# EAGLE board MSP-EXP430F6137Rx-HW-V2_rev-b (EAGLE 5.08), part 1 of 2
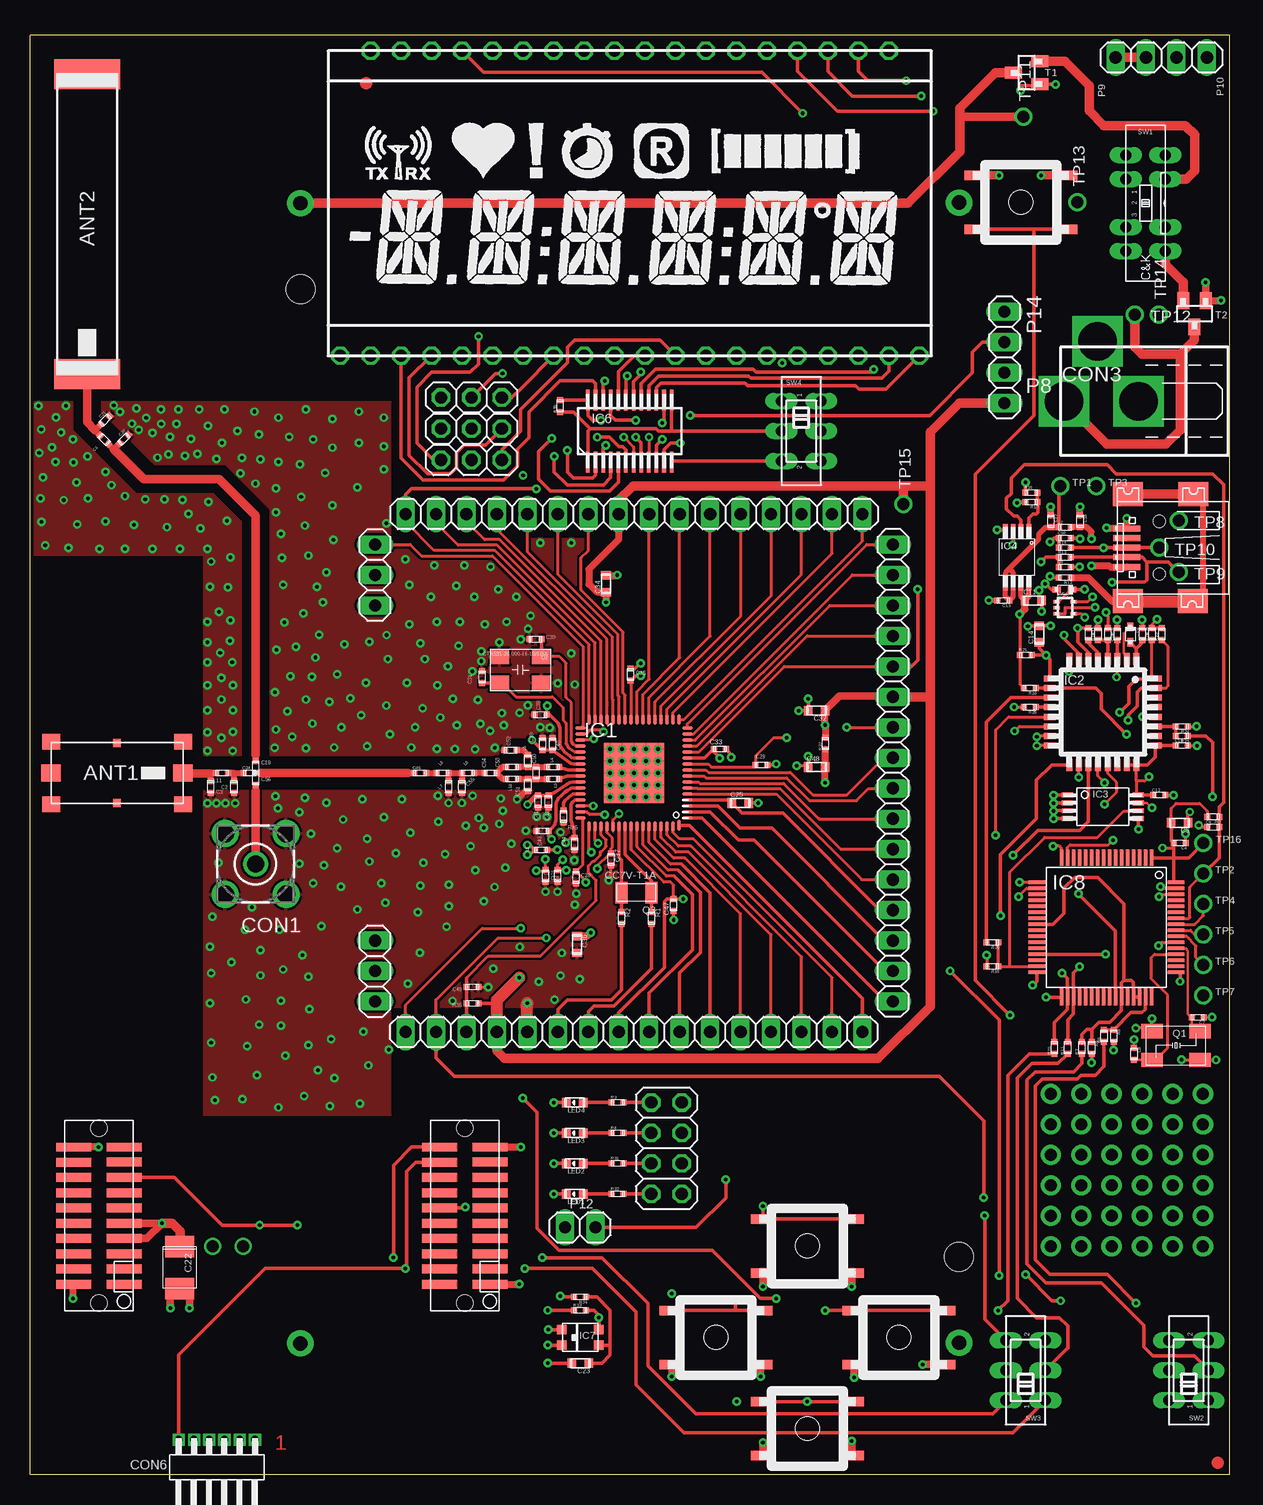
[diagram p0: board, top side]
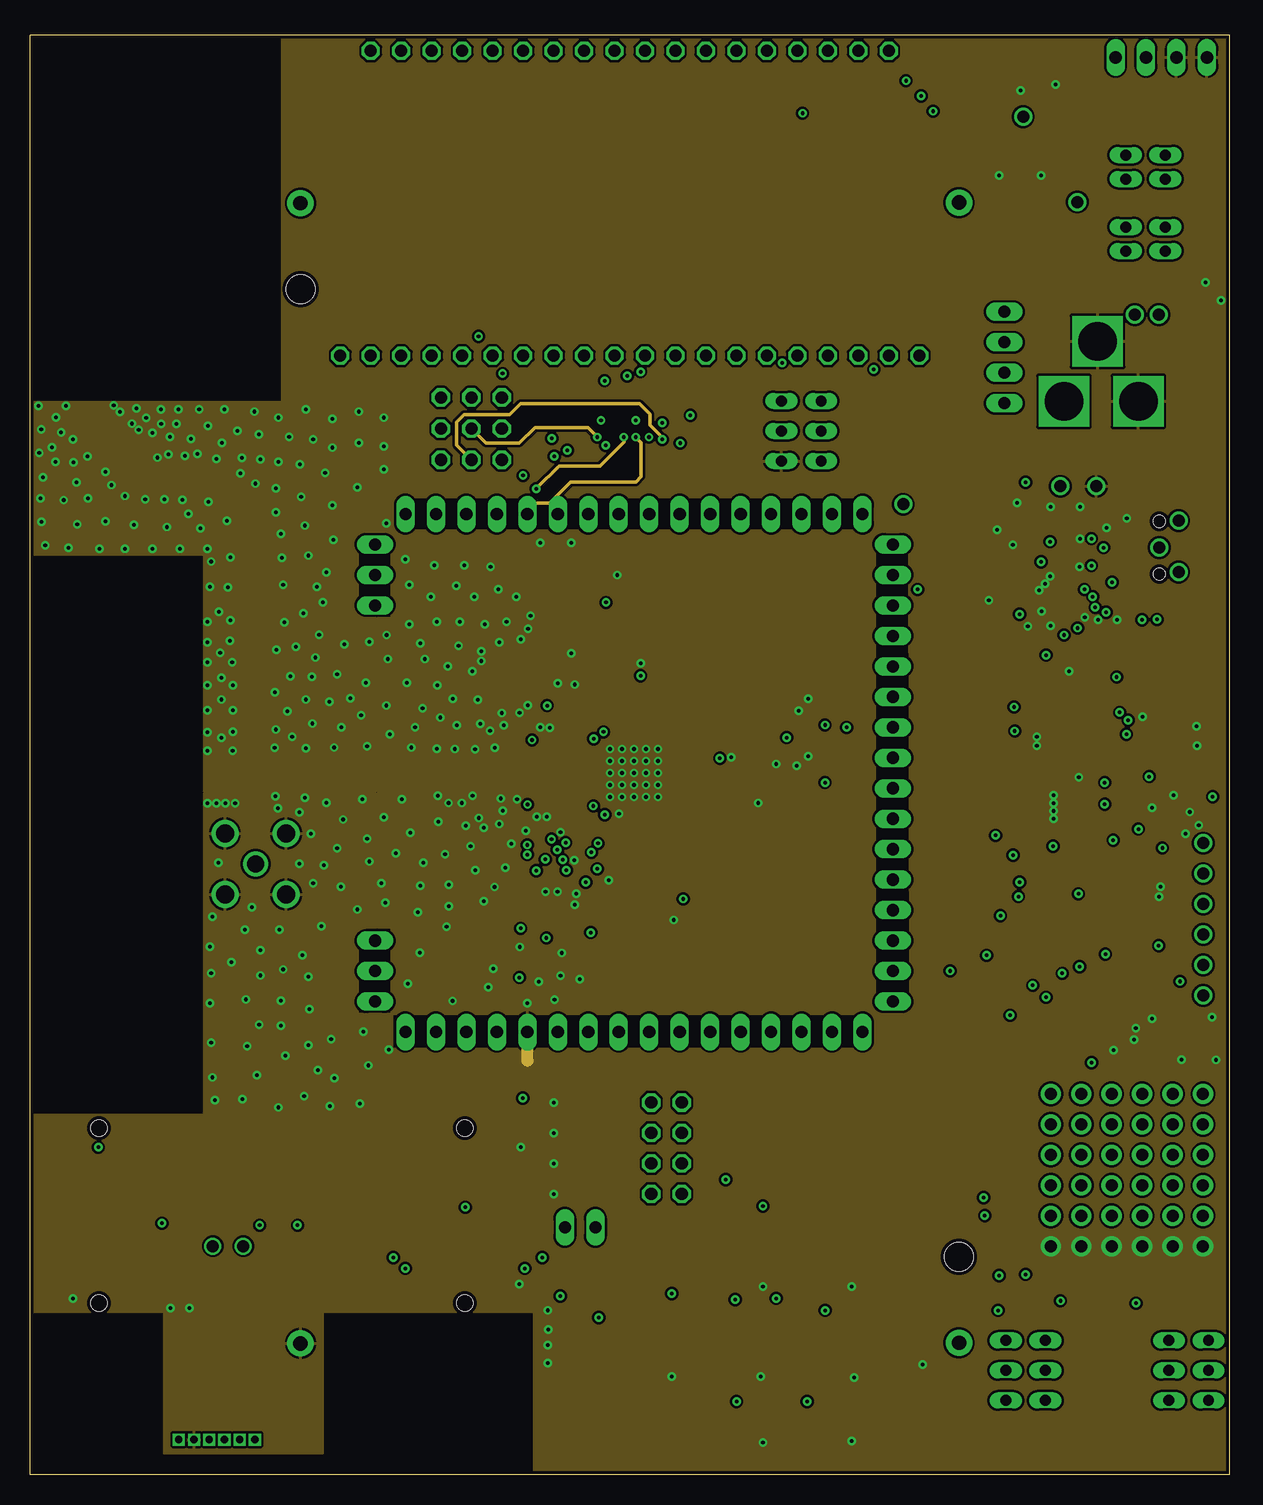
[diagram p1: board, inner layer Route2]
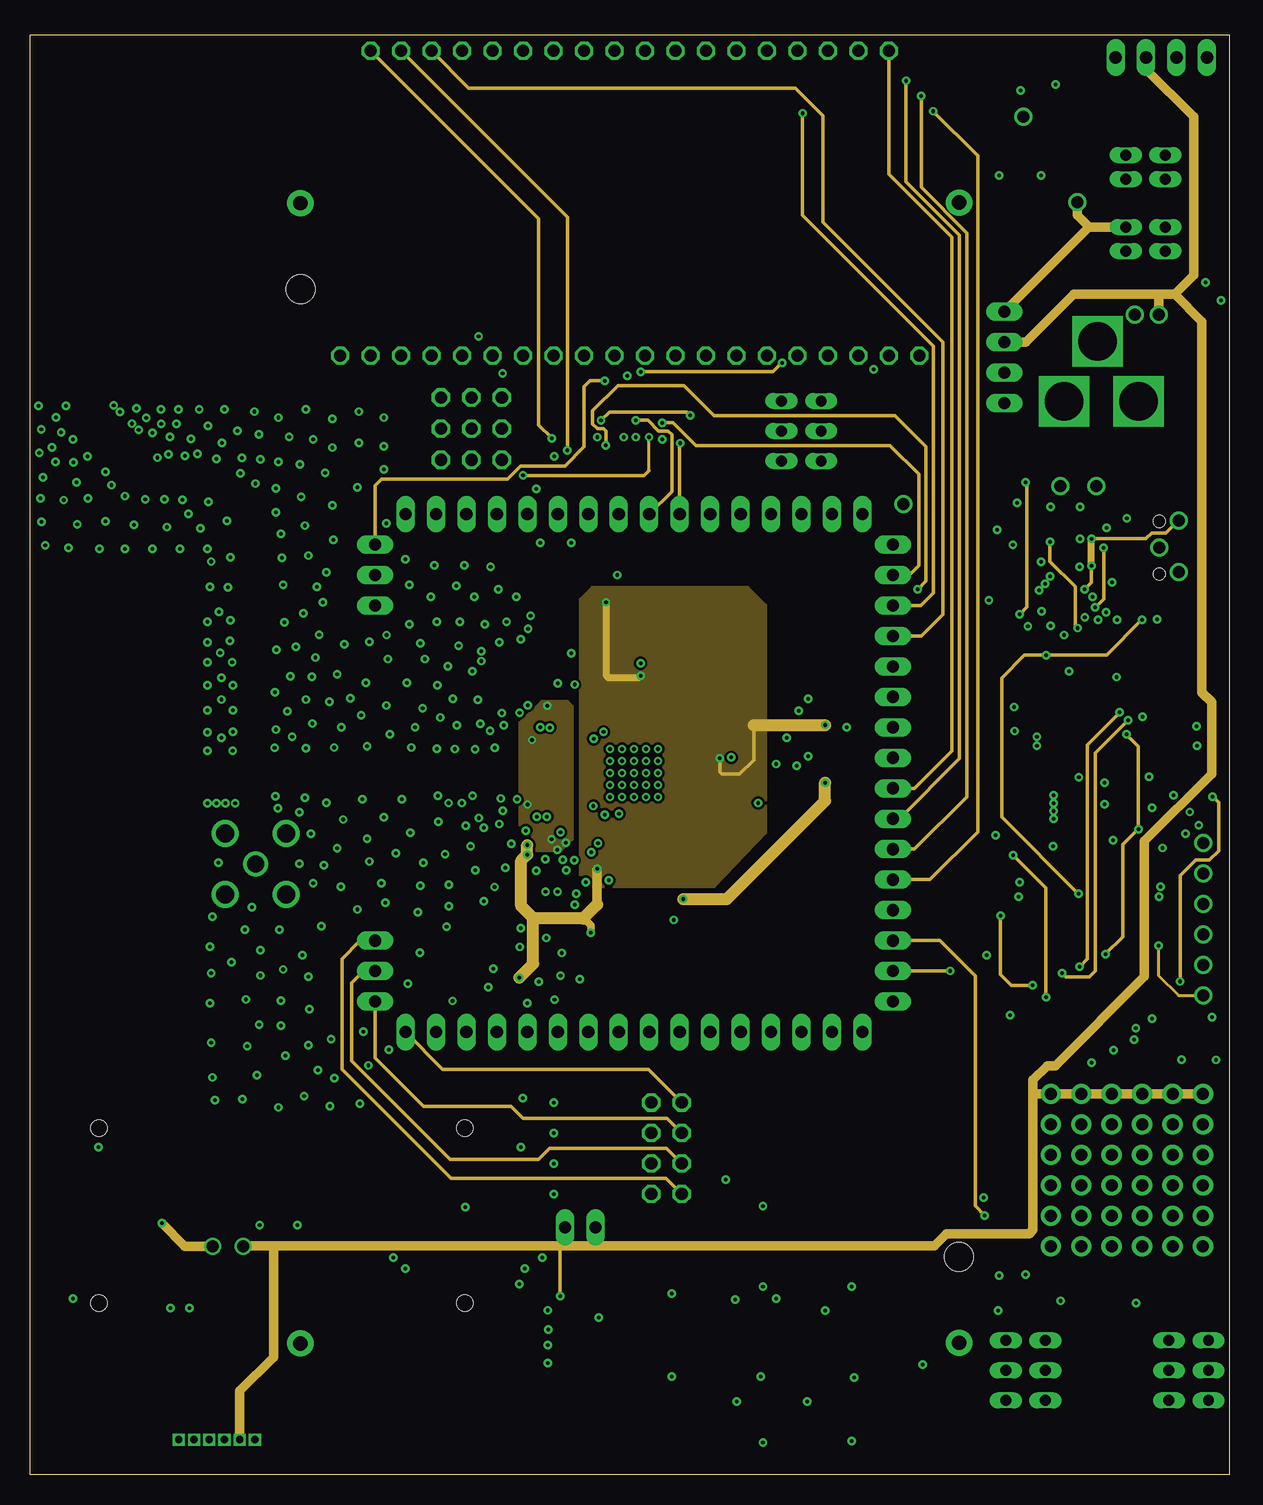
[diagram p2: board, inner layer Route3]
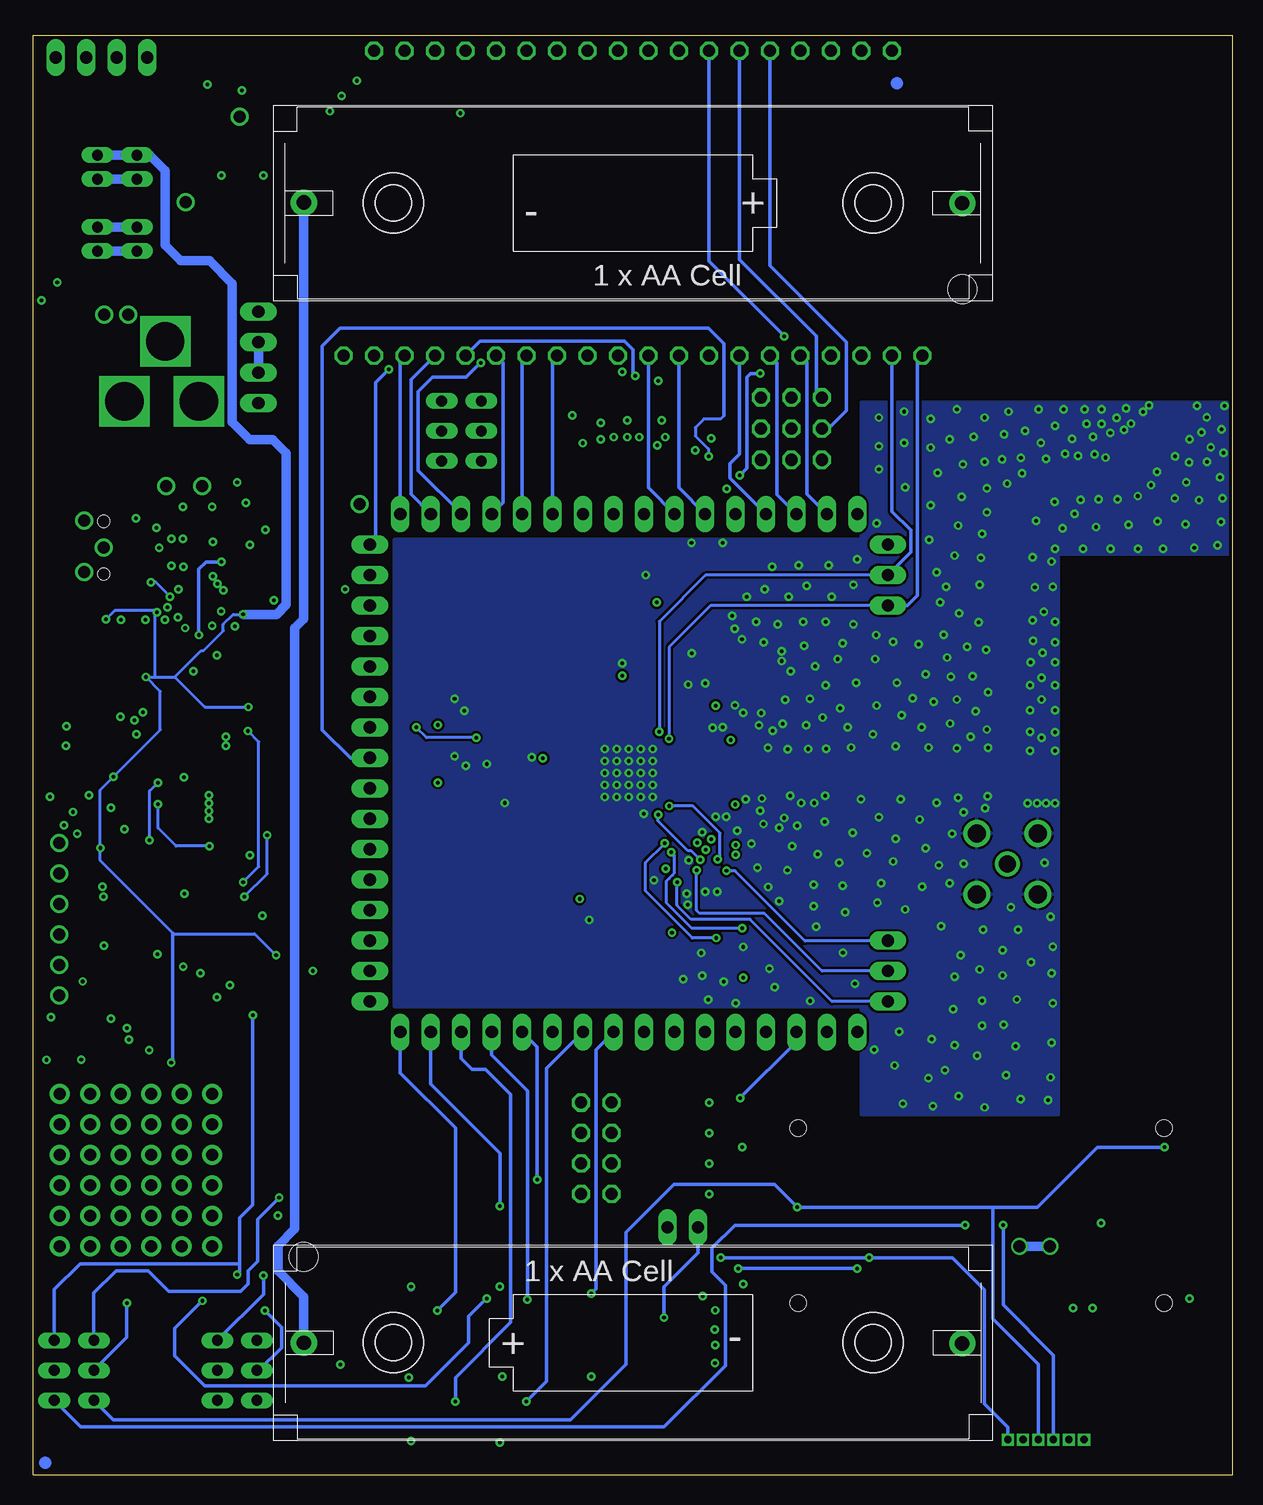
[diagram p3: board, bottom side, seen from below]

Size 100 x 120 mm. Coordinates in mm from the lower left corner, seen from the top.
Outline: 100,120 0,120 0,0 100,0 100,120
Copper layers (1*2+3*16): Top 0.035mm / dielectric 0.41mm / Route2 0.035mm / dielectric 0.3mm / Route3 0.035mm / dielectric 0.41mm / Bottom 0.035mm
Design rules "default *": minimum track width 0.1mm, minimum drill 0.2mm, track to track 0.2mm, track to pad 0.2mm, pad to pad 0.2mm, via to via 0.2mm, smd to smd 0.2mm, copper to edge 0.3mm, drill to drill 0.01mm, minimum pad ring 8mil, minimum via ring 0.2mm, stop-mask expansion 0.05mm, vias tented up to drill 0.4mm, thermal gap 0.2mm
Net classes: 1 ant: clearance 0.8 mm

## Footprints (pad centres in the part's own frame; a part is rotated, then mirrored left to right if it is on the bottom)
7488910092 = smd 1.5 x 1.3: 1 5.5,2.6; 3 5.5,-2.6; 6 -5.5,2.6; 8 -5.5,-2.6 | smd 1.6 x 1.4: 2 5.5,0; 7 -5.5,0 | smd 0.6 x 0.7: 4 0,2.5; 5 0,-2.5
0433AT62A0020 = smd 2.5 x 5.5: 1 -12.5,0; 2 12.5,0
1028-KEYSTONE = drill 1.2 pad 2.184 round: + -27.45,0; - 27.45,-0.05 | hole 2.4: -27.45,7.15
C0402 = smd 0.5 x 0.5: P$1 -0.5,0; P$2 0.5,0
C0603 = smd 0.7 x 0.8: 1 -0.7,0; 2 0.7,0
B/3528 = smd 1.8 x 2.4: 1 -1.75,0; 2 1.75,0
BU-SMA-V = drill 1.4 round: 1 0,0 | drill 1.5 round: 2 -2.55,2.55; 3 2.55,2.55; 4 2.55,-2.55; 5 -2.55,-2.55
USB-MINI-2486_01 = smd 0.5 x 2.25: 1 -1.6,2.7; 2 -0.8,2.7; 3 0,2.7; 4 0.8,2.7; 5 1.6,2.7 | smd 2 x 2.5: 6 4.45,2.6; 7 -4.45,2.6; 8 4.45,-2.85; 9 -4.45,-2.8 | hole 1: 2.2,0; -2.2,0
BUCHSE2,1MM = drill 3.2 square: + 0,6.2; - 0,0; S 5,3.4
SUSBFET_SL127L6_MPE = drill 0.6 pad 0.889 square: 1 -3.17,0.07; 2 -1.91,0.07; 3 -0.63,0.07; 4 0.63,0.07; 5 1.91,0.07; 6 3.18,0.07
SOD523 = smd 0.7 x 0.5: A 0.7,0; C -0.6,0
S-PQFP-N64 = smd 0.9 x 0.3: 1 -4.45,3.75; 2 -4.45,3.25; 3 -4.45,2.75; 4 -4.45,2.25; 5 -4.45,1.75; 6 -4.45,1.25; 7 -4.45,0.75; 8 -4.45,0.25; 9 -4.45,-0.25; 10 -4.45,-0.75; 11 -4.45,-1.25; 12 -4.45,-1.75; 13 -4.45,-2.25; 14 -4.45,-2.75; 15 -4.45,-3.25; 16 -4.45,-3.75; 33 4.45,-3.75; 34 4.45,-3.25; 35 4.45,-2.75; 36 4.45,-2.25; 37 4.45,-1.75; 38 4.45,-1.25; 39 4.45,-0.75; 40 4.45,-0.25; 41 4.45,0.25; 42 4.45,0.75; 43 4.45,1.25; 44 4.45,1.75; 45 4.45,2.25; 46 4.45,2.75; 47 4.45,3.25; 48 4.45,3.75 | smd 0.3 x 0.9: 17 -3.75,-4.45; 18 -3.25,-4.45; 19 -2.75,-4.45; 20 -2.25,-4.45; 21 -1.75,-4.45; 22 -1.25,-4.45; 23 -0.75,-4.45; 24 -0.25,-4.45; 25 0.25,-4.45; 26 0.75,-4.45; 27 1.25,-4.45; 28 1.75,-4.45; 29 2.25,-4.45; 30 2.75,-4.45; 31 3.25,-4.45; 32 3.75,-4.45; 49 3.75,4.45; 50 3.25,4.45; 51 2.75,4.45; 52 2.25,4.45; 53 1.75,4.45; 54 1.25,4.45; 55 0.75,4.45; 56 0.25,4.45; 57 -0.25,4.45; 58 -0.75,4.45; 59 -1.25,4.45; 60 -1.75,4.45; 61 -2.25,4.45; 62 -2.75,4.45; 63 -3.25,4.45; 64 -3.75,4.36 | smd 5 x 5: TP 0,0
VF32 = smd 1 x 0.5: 1 -4.4,2.8; 2 -4.4,2; 3 -4.4,1.2; 4 -4.4,0.4; 5 -4.4,-0.4; 6 -4.4,-1.2; 7 -4.4,-2; 8 -4.4,-2.8; 17 4.4,-2.8; 18 4.4,-2; 19 4.4,-1.2; 20 4.4,-0.4; 21 4.4,0.4; 22 4.4,1.2; 23 4.4,2; 24 4.4,2.8 | smd 0.5 x 1: 9 -2.8,-4.4; 10 -2,-4.4; 11 -1.2,-4.4; 12 -0.4,-4.4; 13 0.4,-4.4; 14 1.2,-4.4; 15 2,-4.4; 16 2.8,-4.4; 25 2.8,4.4; 26 2,4.4; 27 1.2,4.4; 28 0.4,4.4; 29 -0.4,4.4; 30 -1.2,4.4; 31 -2,4.4; 32 -2.8,4.4
TSSOP8 = smd 0.4 x 0.9: 1 -0.975,-2.95; 2 -0.325,-2.95; 3 0.325,-2.95; 4 0.975,-2.95; 5 0.975,2.95; 6 0.325,2.95; 7 -0.325,2.95; 8 -0.975,2.95
MSO8 = smd 0.4 x 1: 1 -0.975,-2.275; 2 -0.325,-2.275; 3 0.325,-2.275; 4 0.975,-2.275; 5 0.975,2.275; 6 0.325,2.275; 7 -0.325,2.275; 8 -0.975,2.275
SOT533-5 = smd 0.3 x 0.55: 1 -0.5,-0.7; 2 0,-0.7; 3 0.5,-0.7; 4 0.5,0.7; 5 -0.5,0.7
24-SSOP = smd 0.3 x 1.75: 1 -3.493,-2.6; 2 -2.857,-2.6; 3 -2.223,-2.6; 4 -1.587,-2.6; 5 -0.953,-2.6; 6 -0.318,-2.6; 7 0.318,-2.6; 8 0.953,-2.6; 9 1.587,-2.6; 10 2.223,-2.6; 11 2.857,-2.6; 12 3.493,-2.6; 13 3.493,2.6; 14 2.857,2.6; 15 2.223,2.6; 16 1.587,2.6; 17 0.953,2.6; 18 0.318,2.6; 19 -0.318,2.6; 20 -0.953,2.6; 21 -1.587,2.6; 22 -2.223,2.6; 23 -2.857,2.6; 24 -3.493,2.6
SFH5711 = smd 0.8 x 0.8: 1 -0.65,-1.55; 2 0.65,-1.55; 3 0.65,1.55; 4 -0.65,1.55
PM/PAG64 = smd 1.4 x 0.3: 1 -5.8,3.75; 2 -5.8,3.25; 3 -5.8,2.75; 4 -5.8,2.25; 5 -5.8,1.75; 6 -5.8,1.25; 7 -5.8,0.75; 8 -5.8,0.25; 9 -5.8,-0.25; 10 -5.8,-0.75; 11 -5.8,-1.25; 12 -5.8,-1.75; 13 -5.8,-2.25; 14 -5.8,-2.75; 15 -5.8,-3.25; 16 -5.8,-3.75; 33 5.8,-3.75; 34 5.8,-3.25; 35 5.8,-2.75; 36 5.8,-2.25; 37 5.8,-1.75; 38 5.8,-1.25; 39 5.8,-0.75; 40 5.8,-0.25; 41 5.8,0.25; 42 5.8,0.75; 43 5.8,1.25; 44 5.8,1.75; 45 5.8,2.25; 46 5.8,2.75; 47 5.8,3.25; 48 5.8,3.75 | smd 0.3 x 1.4: 17 -3.75,-5.8; 18 -3.25,-5.8; 19 -2.75,-5.8; 20 -2.25,-5.8; 21 -1.75,-5.8; 22 -1.25,-5.8; 23 -0.75,-5.8; 24 -0.25,-5.8; 25 0.25,-5.8; 26 0.75,-5.8; 27 1.25,-5.8; 28 1.75,-5.8; 29 2.25,-5.8; 30 2.75,-5.8; 31 3.25,-5.8; 32 3.75,-5.8; 49 3.75,5.8; 50 3.25,5.8; 51 2.75,5.8; 52 2.25,5.8; 53 1.75,5.8; 54 1.25,5.8; 55 0.75,5.8; 56 0.25,5.8; 57 -0.25,5.8; 58 -0.75,5.8; 59 -1.25,5.8; 60 -1.75,5.8; 61 -2.25,5.8; 62 -2.75,5.8; 63 -3.25,5.8; 64 -3.75,5.8
L0402 = smd 0.5 x 0.5: P$1 -0.5,0; P$2 0.5,0
CC-EXP430F6137RF9-LCD = drill 1 octagon: 1 -24.13,-12.7; 2 -21.59,-12.7; 3 -19.05,-12.7; 4 -16.51,-12.7; 5 -13.97,-12.7; 6 -11.43,-12.7; 7 -8.89,-12.7; 8 -6.35,-12.7; 9 -3.81,-12.7; 10 -1.27,-12.7; 11 1.27,-12.7; 12 3.81,-12.7; 13 6.35,-12.7; 14 8.89,-12.7; 15 11.43,-12.7; 16 13.97,-12.7; 17 16.51,-12.7; 18 19.05,-12.7; 19 21.59,-12.7; 20 24.13,-12.7; 21 21.59,12.7; 22 19.05,12.7; 23 16.51,12.7; 24 13.97,12.7; 25 11.43,12.7; 26 8.89,12.7; 27 6.35,12.7; 28 3.81,12.7; 29 1.27,12.7; 30 -1.27,12.7; 31 -3.81,12.7; 32 -6.35,12.7; 33 -8.89,12.7; 34 -11.43,12.7; 35 -13.97,12.7; 36 -16.51,12.7; 37 -19.05,12.7; 38 -21.59,12.7
0603 = smd 0.7 x 0.8: A -0.7,0; K 0.7,0
1X16 = drill 1.016 long: 1 -19.05,0; 2 -16.51,0; 3 -13.97,0; 4 -11.43,0; 5 -8.89,0; 6 -6.35,0; 7 -3.81,0; 8 -1.27,0; 9 1.27,0; 10 3.81,0; 11 6.35,0; 12 8.89,0; 13 11.43,0; 14 13.97,0; 15 16.51,0; 16 19.05,0
1X03 = drill 1.016 long: 1 -2.54,0; 2 0,0; 3 2.54,0
1X3_ROUND = drill 1.016 octagon: 1 -2.54,0; 2 0,0; 3 2.54,0
1X02 = drill 1.016 long: 1 -1.27,0; 2 1.27,0
2X04 = drill 1.016 octagon: 1 -3.81,-1.27; 2 -3.81,1.27; 3 -1.27,-1.27; 4 -1.27,1.27; 5 1.27,-1.27; 6 1.27,1.27; 7 3.81,-1.27; 8 3.81,1.27
5032-4PIN = smd 1.8 x 1.2: 1 -2,-1.2; 2 2,-1.2; 3 2,1.2; 4 -2,1.2
0532 = smd 1.6 x 1.25: 1 -1.75,-1.1; 2 1.75,-1.1; 3 1.75,1.1; 4 -1.75,1.1
CC7V-T1A = smd 1 x 1.8: P$1 -1.25,0; P$2 1.25,0
R0402 = smd 0.5 x 0.5: P$1 -0.5,0; P$2 0.5,0
10X2_SAMTEC_M = smd 0.74 x 2.92: 1 -5.715,-2.113; 2 -5.715,2.113; 3 -4.445,-2.115; 4 -4.445,2.113; 5 -3.175,-2.115; 6 -3.175,2.113; 7 -1.905,-2.115; 8 -1.905,2.113; 9 -0.635,-2.115; 10 -0.635,2.113; 11 0.635,-2.115; 12 0.635,2.113; 13 1.905,-2.115; 14 1.905,2.113; 15 3.175,-2.115; 16 3.175,2.113; 17 4.477,-2.115; 18 4.445,2.113; 19 5.715,-2.115; 20 5.715,2.113 | hole 1.35: -7.305,0; 7.305,0
JS203011CQN = drill 0.9 long: 1 -4,-1.65; 2 -2,-1.65; 3 2,-1.65; 4 4,-1.65; 5 -4,1.65; 6 -2,1.65; 7 2,1.65; 8 4,1.65
JS202011CQN = drill 0.9 long: 1 -2.5,1.65; 2 0,1.65; 3 2.5,1.65; 4 -2.5,-1.65; 5 0,-1.65; 6 2.5,-1.65
B3FS-1002P = smd 0.8 x 2: 1 2.25,3.7; 2 2.25,-3.7; 3 -2.25,3.7; 4 -2.25,-3.7
SOT23-3 = smd 1 x 1.4: 1 -0.95,-1.1; 2 0.95,-1.1; 3 0,1.1
D1.0MM = drill 1 round: P$1 0,0

## Placement (x,y rotation side)
ANT1  0920AT50A080  [7488910092]  7.25,58.5 0 top
ANT2  n.m.  [0433AT62A0020]  4.75,104.25 90 top
BAT1  1028_KEYSTONE  [1028-KEYSTONE]  50,106 180 bottom
BAT2  1028_KEYSTONE  [1028-KEYSTONE]  50,11 0 bottom
C1  n.m.  [C0402]  6.19,86.29 135 top
C2  n.m.  [C0402]  17,57.35 90 top
C3  2.2pF  [C0402]  15.05,57.35 90 top
C4  100nF  [C0402]  95.84,52.68 180 top
C5  1uF  [C0603]  95.84,54.35 180 top
C6  10nF  [C0402]  98.64,53.98 0 top
C7  33pF  [C0402]  97.34,38.13 180 top
C8  33pF  [C0402]  92.04,35.08 270 top
C9  22pF  [C0402]  86.29,75.68 0 top
C10  22pF  [C0402]  86.29,78.08 0 top
C11  1uF  [C0603]  83.64,72.88 0 top
C12  100nF  [C0402]  94.15,56.65 0 top
C13  100nF  [C0402]  81.14,72.88 180 top
C14  1uF  [C0603]  84.14,70.08 90 top
C15  100nF  [C0402]  96.04,60.78 0 top
C16  100nF  [C0402]  90.64,70.08 90 top
C17  100nF  [C0402]  85.09,79.48 270 top
C18  1nF  [C0402]  87.54,79.48 270 top
C19  n.m.  [C0402]  18.8,59 270 top
C20  n.m.  [C0402]  7.83,86.34 45 top
C21  n.m.  [C0402]  6.26,87.91 45 top
C22  100uF  [B/3528]  12.48,17.29 270 top
C23  100nF  [C0603]  45.87,9.3 180 top
C24  68pF  [C0402]  18.3,58.5 0 top
C25  10uF  [C0603]  59.21,56 0 top
C26  2pF  [C0402]  42.98,49.92 270 top
C27  2pF  [C0402]  43.99,49.92 270 top
C28  2pF  [C0402]  45.53,49.8 270 top
C29  470nF  [C0402]  60.98,59.17 180 top
C30  27pF  [C0402]  42.15,69.65 180 top
C31  27pF  [C0402]  37.7,66.5 90 top
C32  10uF  [C0603]  65.58,63.7 180 top
C33  100nF  [C0402]  57.5,60.5 0 top
C34  10uF  [C0603]  48.02,74.28 90 top
C35  100nF  [C0402]  50.07,66.7 90 top
C36  10uF  [C0603]  45.6,44.2 270 top
C37  100nF  [C0402]  48.44,51.3 270 top
C38  100nF  [C0402]  42.55,63.36 180 top
C39  2pF  [C0402]  42.73,60.93 90 top
C40  100nF  [C0402]  43.56,60.93 90 top
C41  2pF  [C0402]  42.34,56.13 270 top
C42  100nF  [C0402]  43.21,56.12 270 top
C43  100nF  [C0402]  42.72,53.68 180 top
C44  100nF  [C0402]  45.41,52.59 270 top
C45  1p5F  [C0402]  32.5,58.5 0 top
C47  100nF  [C0402]  53.65,47.5 90 top
C48  10uF  [C0603]  65.58,59 0 top
C49  2n2F  [C0402]  36.88,40.68 180 top
C50  1pF  [C0402]  42.2,58.5 90 top
C51  1p5F  [C0402]  41.5,57.5 270 top
C52  100pF  [C0402]  40.07,60.4 0 top
C53  1p5F  [C0402]  40.2,59 180 top
C54  1p5F  [C0402]  38.4,58.5 180 top
C55  6p8F  [C0402]  36,57.35 90 top
C56  n.m.  [C0402]  18.8,58 270 top
CON1  n.m.  [BU-SMA-V]  18.8,50.92 180 top
CON2  USB-MINI_2486_01  [USB-MINI-2486_01]  94.14,77.28 90 top
CON3  NEB21R  [BUCHSE2,1MM]  92.4,89.48 90 top
CON6  n.m.  [SUSBFET_SL127L6_MPE]  15.58,3 180 top
D1  1N4148WT  [SOD523]  91.74,70.08 270 top
D2  n.m. (PESD5V0U1UB)  [SOD523]  86.29,73.78 180 top
IC1  CC430F6137IRGC  [S-PQFP-N64]  50.36,58.5 180 top
IC2  TUSB3410VF  [VF32]  89.44,63.58 270 top
IC3  AT24C12810-TU  [TSSOP8]  89.44,55.68 270 top
IC4  TPS77301DGK  [MSO8]  82.29,76.48 180 top
IC5  TPD2E001DRL  [SOT533-5]  86.29,72.28 270 top
IC6  SN74CBTLV3384  [24-SSOP]  50,87 0 top
IC7  SFH5711  [SFH5711]  45.87,11.45 270 top
IC8  MSP430F1612IPM  [PM/PAG64]  89.74,45.63 270 top
L1  BLM15HG102SN1D  [L0402]  42.61,52.1 0 top
L2  BLM15AX700SN1  [L0402]  86.29,78.98 0 top
L4  12nH  [L0402]  43.6,59 0 top
L5  18nH  [L0402]  41.5,59.5 270 top
L6  15nH  [L0402]  36.5,58.5 180 top
L7  2,2nH  [L0402]  34.9,57.35 90 top
L8  15nH  [L0402]  34.4,58.5 180 top
L9  12nH  [L0402]  43.6,58 180 top
L10  18nH  [L0402]  40.2,58 180 top
L11  15nH  [L0402]  16.02,58.5 0 top
LCD1  TI custom LCD FH-1138H  [CC-EXP430F6137RF9-LCD]  50,105.99 0 top
LED1  APT1608QBC/D(blue)  [0603]  45.41,23.41 180 top
LED2  APT1608MGC(green)  [0603]  45.41,25.95 180 top
LED3  APT1608SYCK(yellow)  [0603]  45.41,28.49 180 top
LED4  APT1608SRCPRV(red)  [0603]  45.41,31.03 180 top
M1  FIDUCIAL_MARK  [FIDUCIAL]  99,1 0 top
M2  FIDUCIAL_MARK  [FIDUCIAL]  99,1 0 bottom
M3  FIDUCIAL_MARK  [FIDUCIAL]  28,116 180 top
M4  FIDUCIAL_MARK  [FIDUCIAL]  28,116 180 bottom
P1  PINHD-1X16  [1X16]  50.35,36.91 180 top
P2  PINHD-1X16  [1X16]  50.35,80.09 0 top
P3  PINHD-1X16  [1X16]  71.94,58.5 270 top
P4  PINHD-1X3  [1X03]  28.76,75.01 90 top
P5  PINHD-1X3  [1X03]  28.76,41.99 90 top
P6  PINHD-1X3_ROUND  [1X3_ROUND]  36.8,89.8 0 top
P7  PINHD-1X3_ROUND  [1X3_ROUND]  36.8,87.2 0 top
P8  PINHD-1X2  [1X02]  81.23,90.6 270 top
P9  PINHD-1X2  [1X02]  91.77,118.15 0 top
P10  PINHD-1X2  [1X02]  96.85,118.15 0 top
P11  PINHD-1X3_ROUND  [1X3_ROUND]  36.8,84.6 0 top
P12  PINHD-1X2  [1X02]  45.87,20.62 180 top
P13  PINHD-2X4  [2X04]  53.06,27.22 270 top
P14  PINHD-1X2  [1X02]  81.23,95.68 270 top
Q1  FT10A-12,0/16-30-30/27  [5032-4PIN]  95.54,35.78 0 top
Q2  CTA531-26.000-16-10/10/A  [0532]  40.9,67.1 180 top
Q3  CC7V-T1A  [CC7V-T1A]  50.55,48.52 180 top
R1  n.m.  [R0402]  51.8,46.4 270 top
R2  n.m.  [R0402]  49.3,46.4 270 top
R3  470R  [R0402]  49,31.03 0 top
R4  750R  [R0402]  49,28.49 0 top
R5  47kR  [R0402]  98.64,54.85 180 top
R6  100R  [R0402]  89.54,36.58 90 top
R7  100R  [R0402]  87.7,35.6 90 top
R8  47kR  [R0402]  90.34,36.58 270 top
R9  47kR  [R0402]  88.5,35.6 270 top
R10  100R  [R0402]  85.4,35.6 90 top
R11  100R  [R0402]  86.5,35.6 90 top
R12  33kR  [R0402]  86.29,74.78 180 top
R13  33R  [R0402]  86.29,76.48 0 top
R14  33R  [R0402]  86.29,77.28 0 top
R15  1.5kR  [R0402]  88.24,70.08 270 top
R16  6.8kR  [R0402]  83.49,81.88 0 top
R17  3.3kR  [R0402]  83.49,81.08 180 top
R18  1.5kR  [R0402]  83.34,65.58 180 top
R19  1.5kR  [R0402]  80.24,42.38 180 top
R20  100R  [R0402]  80.24,44.38 180 top
R21  15kR  [R0402]  83.02,68.34 0 top
R22  47kR  [R0402]  93.54,70.08 90 top
R23  47kR  [R0402]  94.34,70.08 90 top
R24  3k3R  [R0402]  96.04,62.38 180 top
R25  3.3kR  [R0402]  96.04,61.58 180 top
R26  100kR/1%  [R0402]  89.84,70.08 270 top
R27  100kR/1%  [R0402]  89.04,70.08 90 top
R28  33kR  [R0402]  92.74,70.08 270 top
R29  10kR  [R0402]  83.34,63.98 180 top
R30  47kR  [R0402]  44.2,89.1 90 top
R31  100R  [R0402]  49,25.95 0 top
R32  270R  [R0402]  49,23.41 0 top
R33  56kR  [R0402]  45.87,13.7 0 top
R34  0  [R0402]  45.87,14.83 180 top
R35  56kR  [R0402]  44.47,54.86 270 top
R36  47kR  [R0402]  36.88,39.3 0 top
R37  0R  [R0402]  66.31,60.97 90 top
RF1  TFM-110-02-S-D-A-K  [10X2_SAMTEC_M]  36.25,21.6 90 top
RF2  TFM-110-02-S-D-A-K  [10X2_SAMTEC_M]  5.75,21.6 90 top
SW1  JS203011CQN  [JS203011CQN]  93,106 270 top
SW2  J202011CQN  [JS202011CQN]  96.6,8.7 90 top
SW3  J202011CQN  [JS202011CQN]  83,8.7 90 top
SW4  J202011CQN  [JS202011CQN]  64.3,87 270 top
SW_D  FSM2JSMA  [B3FS-1002P]  64.81,3.85 90 top
SW_L  FSM2JSMA  [B3FS-1002P]  57.19,11.45 90 top
SW_R  FSM2JSMA  [B3FS-1002P]  72.43,11.45 90 top
SW_RES  FSM2JSMA  [B3FS-1002P]  82.6,106.07 270 top
SW_U  FSM2JSMA  [B3FS-1002P]  64.81,19.07 90 top
T1  SI2323DS  [SOT23-3]  83.09,116.87 90 top
T2  SI2323DS  [SOT23-3]  97.08,96.78 180 top
TP1  TP_THD1.0MM  [D1.0MM]  85.9,82.4 270 top
TP2  TP_THD1.0MM  [D1.0MM]  97.82,50.11 270 top
TP3  TP_THD1.0MM  [D1.0MM]  88.9,82.4 270 top
TP4  TP_THD1.0MM  [D1.0MM]  97.82,47.57 270 top
TP5  TP_THD1.0MM  [D1.0MM]  97.82,45.03 270 top
TP6  TP_THD1.0MM  [D1.0MM]  97.82,42.49 270 top
TP7  TP_THD1.0MM  [D1.0MM]  97.82,39.95 270 top
TP8  TP_THD1.0MM  [D1.0MM]  95.75,79.55 270 top
TP9  TP_THD1.0MM  [D1.0MM]  95.75,75.25 270 top
TP10  TP_THD1.0MM  [D1.0MM]  94.14,77.28 270 top
TP11  TP_THD1.0MM  [D1.0MM]  82.8,113.2 0 top
TP12  TP_THD1.0MM  [D1.0MM]  92.1,96.7 270 top
TP13  TP_THD1.0MM  [D1.0MM]  87.3,106.1 0 top
TP14  TP_THD1.0MM  [D1.0MM]  94.1,96.7 0 top
TP15  TP_THD1.0MM  [D1.0MM]  72.8,80.9 0 top
TP16  TP_THD1.0MM  [D1.0MM]  97.82,52.65 0 top
U$1  [STI_LOGO_LOGO16_TPLACE]  4.74,33.2 90 top
U$2  [CE_LOGO_6MM]  12.7,66.04 90 top

## Library data of the parts
ANT1 = chipantenne
ANT2 = HF-Bauteile
BAT1 BAT2 = con-batterie
C1-C45 C47-C56 L1 L2 L4-L11 R1-R37 = rcl-amber
CON1 = con-hf
CON2 = con-usb
CON3 = con-dc
CON6 = MSP-EXPG2_Rev.1.3
D1 D2 = diode
IC1 IC2 IC5 IC6 = TI
IC3 = EEProm
IC4 = v-reg
IC7 LED1-LED4 = optic
IC8 = TI_MSP430_v13
LCD1 = LCD
M1-M4 = fiducial
P1-P14 = pinhead
Q1-Q3 = crystal-smd
RF1 RF2 = AMBZxxx-EV
SW1-SW4 SW_D SW_L SW_R SW_RES SW_U = switch-omron
T1 T2 = DIEHL
TP1-TP16 = testpad
U$1 = CC-EXP430F6137RF9_HW-V1
U$2 = amber

## Nets
1: IC1.35 LCD1.1 P4.1
2: IC1.34 LCD1.2 P4.2
3: IC6.23 LCD1.3
3_S: IC1.33 IC6.22 P4.3
3V6_USB: C4.P$2 C5.2 C11.1 C12.P$1 C15.P$1 C16.P$1 IC2.3 IC2.23 IC2.24 IC2.25 IC3.8 IC4.7 IC4.8 IC8.1 IC8.64 R5.P$2 R9.P$2 R16.P$1 R18.P$2 R19.P$2 R21.P$1 R22.P$2 R23.P$2 R26.P$1 R29.P$2 SW1.1 SW1.5 TP16.P$1
4: LCD1.4 P7.3
4_34: IC6.6 P7.2
4_34_S: IC1.32 IC6.7 P2.1
5: IC1.31 LCD1.5 P2.2
6: IC1.30 LCD1.6 P2.3
7: IC1.29 LCD1.7 P2.4
8: LCD1.8 P6.3
8_33: IC6.9 P6.2
8_33_S: IC1.28 IC6.8 P2.5
9: IC1.27 LCD1.9 P2.6
10: IC1.26 LCD1.10 P2.7
11: IC6.20 LCD1.11
11_S: IC1.24 IC6.21 P2.9
12: LCD1.12 P11.3
12_32: IC6.10 P11.2
12_32_S: IC1.23 IC6.11 P2.10
13: IC1.22 LCD1.13 P2.11
14: IC1.21 LCD1.14 P2.12
15: IC1.20 LCD1.15 P2.13
16: IC6.19 LCD1.16
16_S: IC1.19 IC6.18 P2.14
17: IC1.18 LCD1.17 P2.15
18: IC1.17 LCD1.18 P2.16
19: IC6.16 LCD1.19
19_S: IC1.16 IC6.17 P3.1
20: IC6.15 LCD1.20
20_S: IC1.15 IC6.14 P3.2
32: LCD1.32 P11.1
33: LCD1.33 P6.1
34: LCD1.34 P7.1
35: IC1.14 LCD1.35 P3.3
36: IC1.13 LCD1.36 P3.4
37: IC6.2 LCD1.37
37_S: IC1.12 IC6.3 P3.5
38: IC6.5 LCD1.38
38_S: IC1.9 IC6.4 P3.8
/RST3410: C14.1 IC2.9 IC8.42 R21.P$2 R28.P$1
/RST/SBWTDIO_INT: C49.P$2 IC1.51 P1.14 R36.P$1 SW2.6 SW_RES.1 SW_RES.2
/RST_FLASH: C6.P$2 IC4.2 IC8.58 R5.P$1 TP2.P$1
ANT2 [ant]: C56.P$2 CON1.1
AVCC: C47.P$2 C48.2 IC1.56 P1.9 R37.P$1
BRXD: R11.P$1 SW3.5
BRXD<TX_EXT: CON6.6 RF1.18 SW3.4
BRXDI: IC2.32 IC8.35 R11.P$2 R22.P$1
BTXD: R10.P$1 SW3.2
BTXD>RX_EXT: CON6.1 RF1.20 SW3.1
BTXDI: IC2.31 IC8.34 R10.P$2 R23.P$1
CLK3410: IC8.49 R25.P$1
COM1: IC1.5 LCD1.24 P3.12
COM2: IC1.6 LCD1.23 P3.11
COM3: IC1.7 LCD1.22 P3.10
COM4: IC1.8 LCD1.21 P3.9
D+: CON2.3 IC5.3 R14.P$2 TP10.P$1
D-: CON2.2 IC5.5 R13.P$2 TP9.P$1
GND: BAT2.- C2.P$1 C3.P$1 C4.P$1 C5.1 C6.P$1 C7.P$1 C8.P$1 C9.P$2 C10.P$2 C11.2 C12.P$2 C13.P$2 C14.2 C15.P$2 C16.P$2 C17.P$1 C18.P$1 C20.P$2 C21.P$2 C22.2 C23.2 C25.2 C26.P$2 C27.P$2 C28.P$2 C29.P$1 C30.P$2 C31.P$2 C32.2 C33.P$2 C34.2 C35.P$2 C36.2 C37.P$2 C38.P$2 C39.P$2 C40.P$2 C41.P$2 C42.P$2 C43.P$2 C44.P$2 C47.P$1 C48.1 C49.P$1 C51.P$2 C52.P$1 C55.P$1 CON1.2 CON1.3 CON1.4 CON1.5 CON2.5 CON3.- CON3.S CON6.5 D2.A IC1.53 IC1.TP IC2.8 IC2.15 IC2.16 IC2.18 IC2.28 IC3.1 IC3.2 IC3.3 IC3.4 IC3.7 IC4.3 IC4.4 IC5.4 IC6.12 IC7.1 IC7.2 IC8.62 IC8.63 L7.P$1 LED1.K LED2.K LED3.K LED4.K P1.12 P10.1 P10.2 Q1.2 Q1.4 Q2.2 Q2.4 R8.P$2 R12.P$2 R17.P$2 R24.P$1 R27.P$2 R33.P$1 R35.P$2 RF1.1 RF1.19 RF2.2 SW4.6 SW_D.3 SW_D.4 SW_L.3 SW_L.4 SW_R.3 SW_R.4 SW_RES.3 SW_RES.4 SW_U.3 SW_U.4 T1.1 T2.1 TP3.P$1
HTCK: IC8.57 TP4.P$1
HTDI: IC8.55 TP6.P$1
HTDO: IC8.54 TP7.P$1
HTMS: IC8.56 TP5.P$1
LCDCAP: C25.1 IC1.4 P3.13
N$1: C30.P$1 IC1.36 Q2.1
N$2: C31.P$1 IC1.37 Q2.3
N$3: IC1.40 L4.P$2
N$4: C52.P$2 L5.P$1
N$5: IC1.41 L9.P$1
N$6: C53.P$2 C54.P$1 L10.P$2
N$7: C55.P$2 L6.P$2 L7.P$2 L8.P$1
N$8: C2.P$2 C24.P$1 L11.P$2
N$9: LED4.A R3.P$1
N$10: P1.11 R2.P$2
N$11: C50.P$1 C51.P$1 L9.P$2 L10.P$1
N$12: C50.P$2 C53.P$1 L4.P$1 L5.P$2
N$13: C54.P$2 L6.P$1
N$14: IC1.44 R35.P$1
N$15: LED3.A R4.P$1
N$16: P13.1 R3.P$2
N$17: P13.3 R4.P$2
N$18: ANT1.2 C3.P$2 L11.P$1
N$19: C45.P$2 L8.P$2
N$20: C19.P$2 C24.P$2 C45.P$1 C56.P$1
N$23: C7.P$2 IC8.53 Q1.3
N$24: C8.P$2 IC8.52 Q1.1
N$25: IC8.47 R6.P$2 R8.P$1
N$26: IC8.24 IC8.43 IC8.45 IC8.46 R7.P$2 R9.P$1
N$27: CON2.6 CON2.7 CON2.8 CON2.9 R12.P$1
N$28: C10.P$1 IC2.6 R14.P$1 R15.P$1
N$29: C18.P$2 CON2.1 D2.C IC5.1 L2.P$2 TP8.P$1
N$32: C9.P$1 IC2.7 R13.P$1
N$33: IC2.12 R29.P$1
N$34: IC2.5 R15.P$2
N$35: IC4.1 R16.P$2 R17.P$1
N$36: BAT1.+ T1.3 TP11.P$1
N$37: ANT2.1 C1.P$2 C21.P$1
N$38: BAT1.- BAT2.+
N$39: CON3.+ T2.3 TP12.P$1
N$40: D1.C IC2.2
N$41: IC2.11 R20.P$2
N$42: IC2.27 R24.P$2 R25.P$2
N$43: IC2.4 R26.P$2 R27.P$1
N$44: D1.A IC2.1 R28.P$2
N$45: IC6.1 IC6.13 R30.P$1 SW4.5
N$46: LED2.A R31.P$1
N$47: LED1.A R32.P$1
N$48: P13.5 R31.P$2
N$49: P13.7 R32.P$2
N$51: IC7.4 P12.2 R33.P$2
N$52: C23.1 IC7.3 R34.P$1
N$57: P1.10 R1.P$2
N$74: C1.P$1 C19.P$1 C20.P$1
P1.5/UCA0RXD: IC1.3 P3.14 SW3.3
P1.6/UCA0TXD: IC1.2 P3.15 SW3.6
P1.7: IC1.1 P3.16
P2.0: IC1.64 P1.1 SW_R.1 SW_R.2
P2.1: IC1.63 P1.2 SW_U.1 SW_U.2
P2.2: IC1.62 P1.3 SW_D.1 SW_D.2
P2.3: IC1.61 P1.4 SW_L.1 SW_L.2
P2.4: IC1.60 P1.5 P12.1
P2.5: IC1.59 P1.6
P2.6: IC1.58 P1.7
P2.7: IC1.57 P1.8
P5.0: IC1.55 Q3.P$1 R1.P$1
P5.1: IC1.54 Q3.P$2 R2.P$1
PJ.0: C26.P$1 IC1.46 P5.3 P13.8
PJ.1: C27.P$1 IC1.47 P5.2 P13.6
PJ.2: C28.P$1 IC1.48 P5.1 P13.4
PJ.3: IC1.49 P1.16 P13.2
SBWTCK: R6.P$1 SW2.2
SBWTCK_EXT: CON6.3 RF1.12 RF2.20 SW2.1
SBWTDIO: R7.P$1 SW2.5
SBWTDIO_EXT: CON6.4 RF2.15 SW2.4
SCL: IC3.6 IC8.31 R19.P$1 R20.P$1
SDA: IC2.10 IC3.5 IC8.29 R18.P$1
TEST/SBWTCK_INT: IC1.50 P1.15 SW2.3
UCTS: IC2.13 IC8.18
UDSR: IC2.14 IC8.17
UDTR: IC2.21 IC8.16
URTS: IC2.20 IC8.15
URXD: IC2.19 IC8.33
UTXD: IC2.17 IC8.32
V_BUS: C13.P$1 C17.P$2 IC4.5 IC4.6 L2.P$1 TP1.P$1
VCC_BAT: SW1.2 SW1.6 T1.2
VCC_CC430: C32.1 C33.P$1 C34.1 C35.P$1 C36.1 C37.P$1 IC1.11 IC1.25 IC1.52 L1.P$1 P1.13 P2.8 P3.6 P8.2 R36.P$2 R37.P$2 TP15.P$1
VCC_DC: SW1.4 SW1.8 T2.2
VCC_IN: C22.1 CON6.2 IC6.24 P8.1 P9.1 P9.2 P14.2 R30.P$2 R34.P$2 RF2.7 RF2.9 TP14.P$1
VCC_IN_ALL: P14.1 SW1.3 SW1.7 TP13.P$1
VCC_RF: C38.P$1 C39.P$1 C40.P$1 C41.P$1 C42.P$1 C43.P$1 C44.P$1 IC1.38 IC1.39 IC1.42 IC1.43 IC1.45 L1.P$2
VCORE: C29.P$2 IC1.10 P3.7